# Altium PCB PCB1.PcbDoc
Units mm, origin at the board's own origin, x right, y up, seen from the top; angles counter-clockwise.
Board outline 52.96 x 24.13 mm, 4 copper layers (Top Layer, Int1 (GND), Int2 (PWR), Bottom Layer), stack 1.57 mm thick; 38 components, 32 nets, 151 pads, 60 vias.
Unrouted connection lines stored in the file: 4.
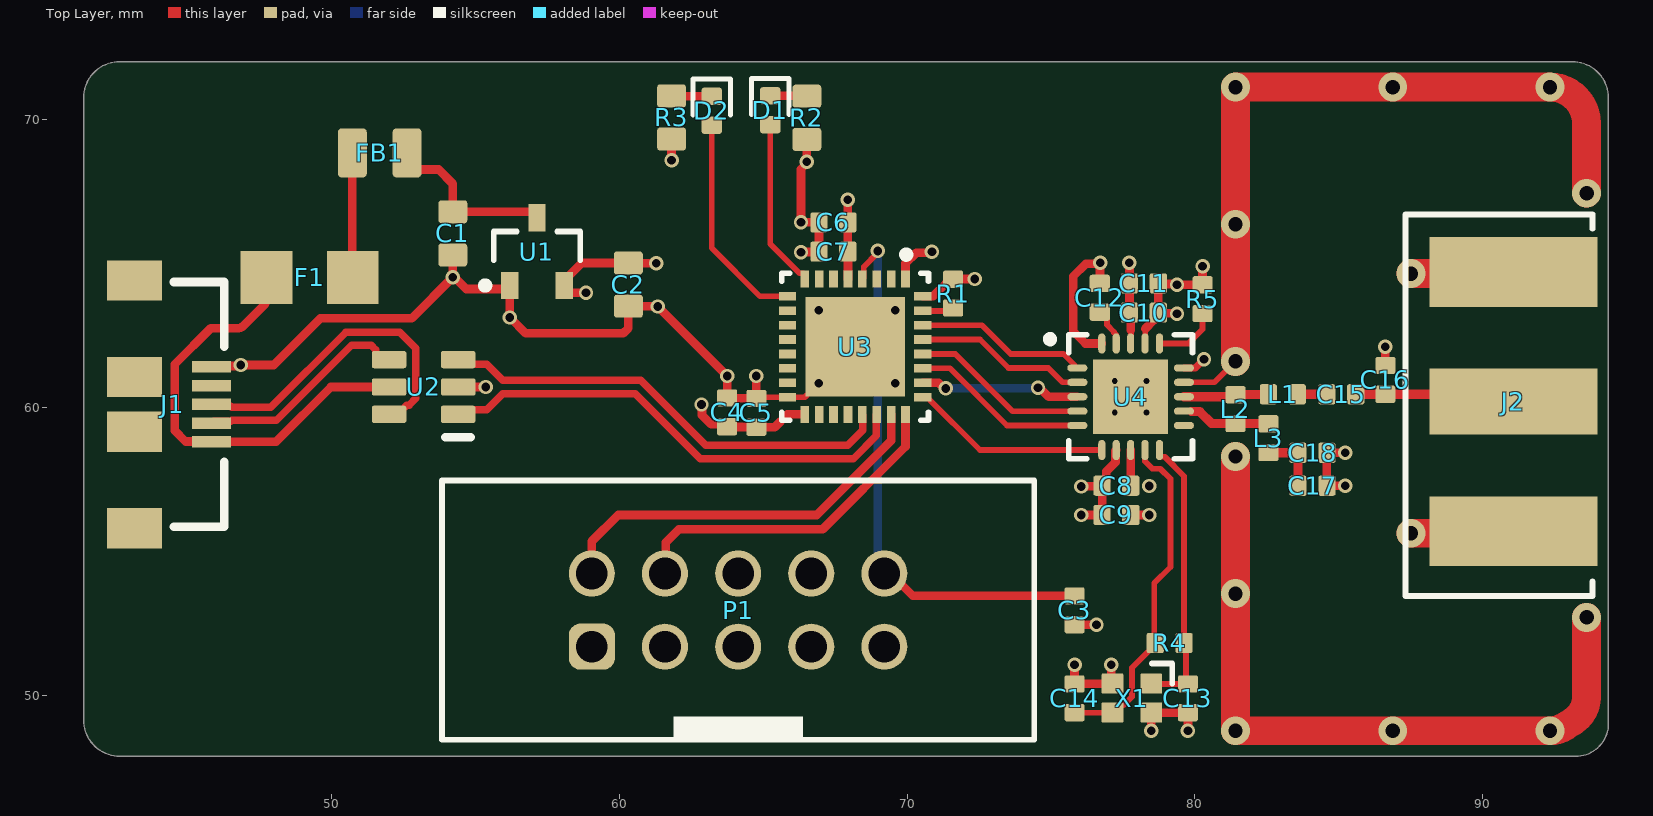
[diagram p0: Top Layer view]
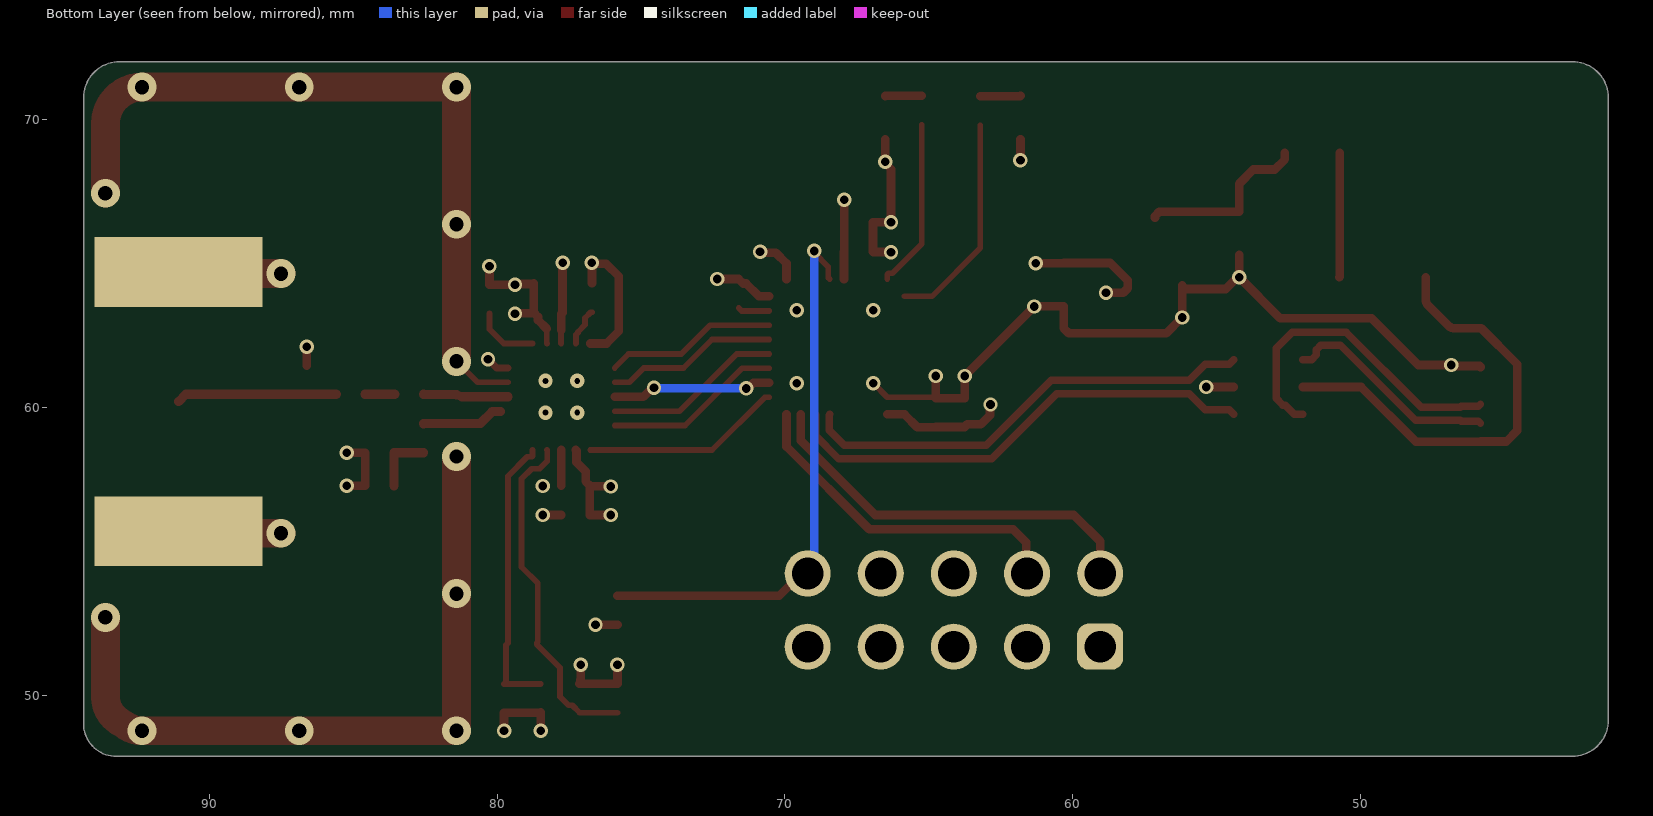
[diagram p1: Bottom Layer view, seen from below]
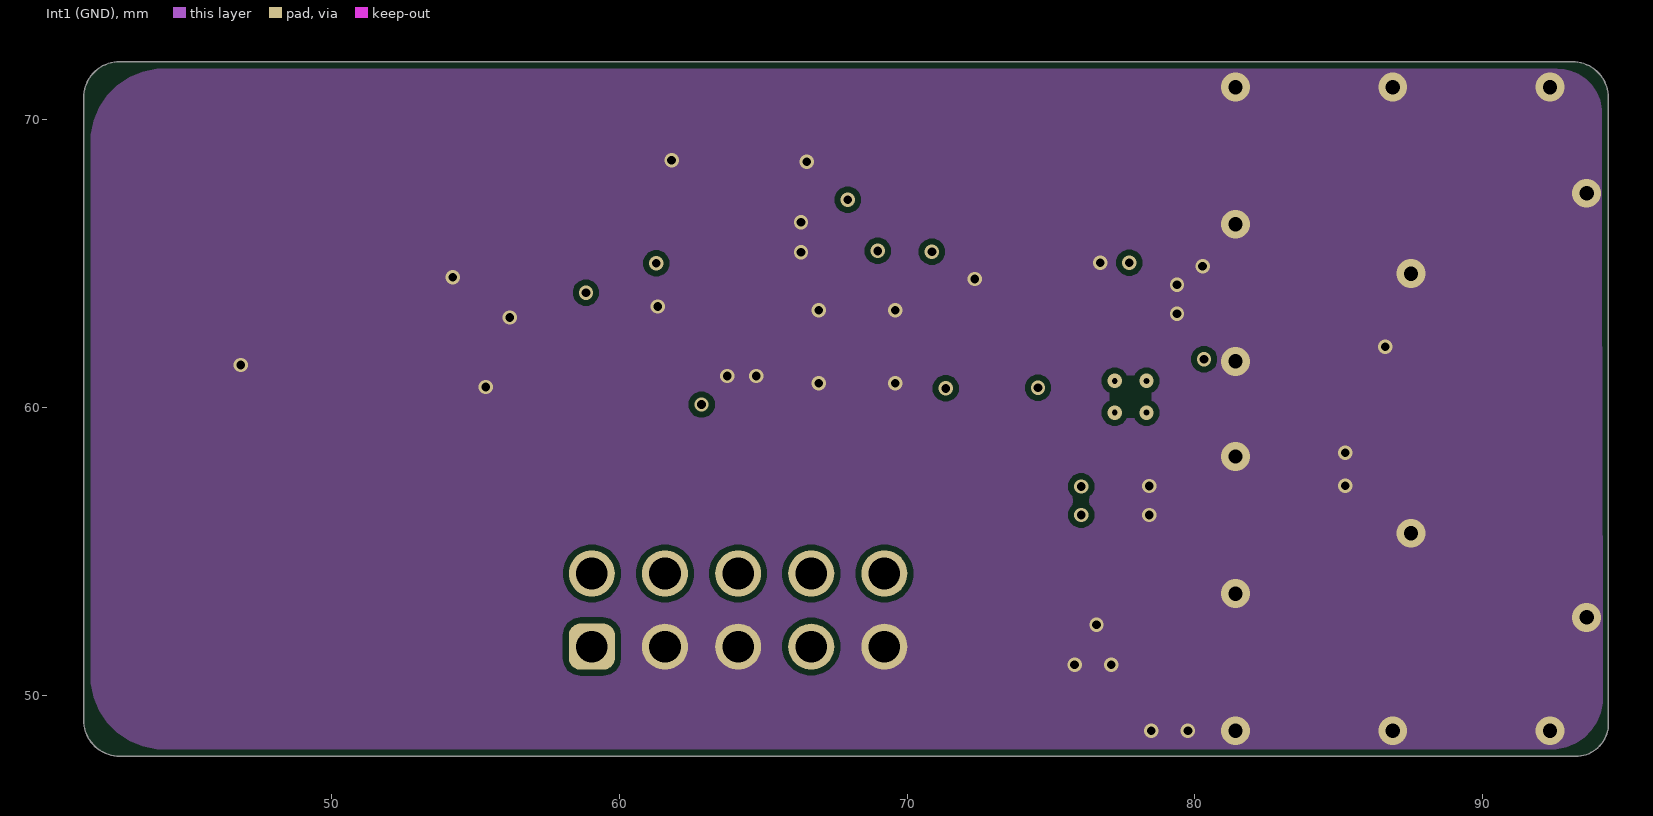
[diagram p2: Int1 (GND)]
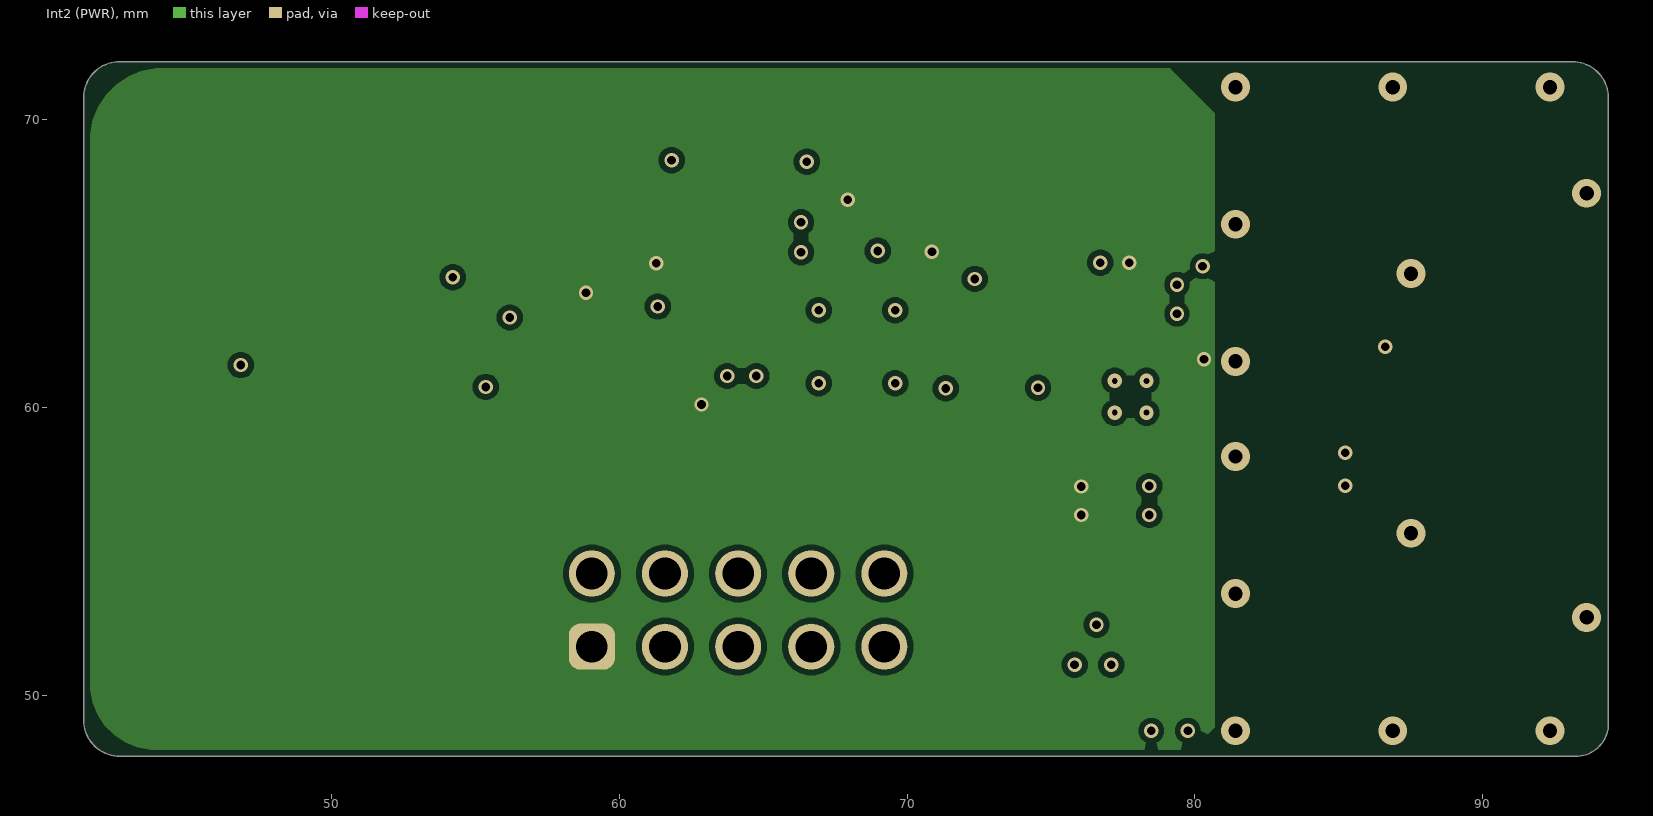
[diagram p3: Int2 (PWR)]
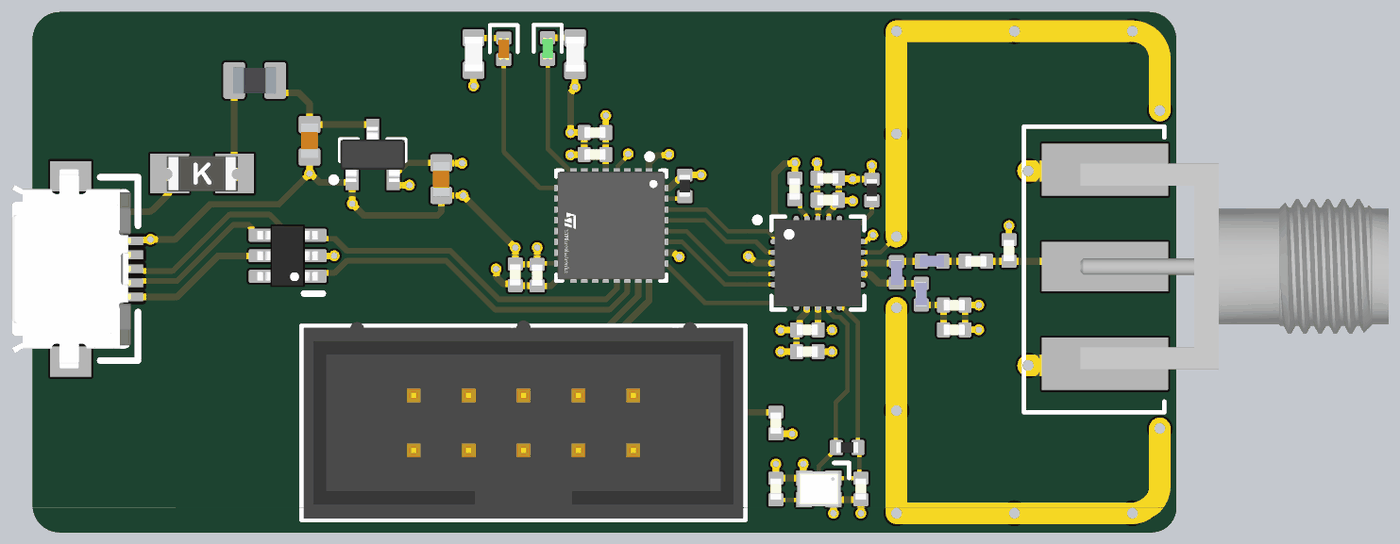
[diagram p4: 3D render of the assembled board from above, using the file's embedded part models]

## Layer stack, top to bottom
Top Solder: solder mask 0.0254, SM-001, Dk 4
Top Layer: signal copper 0.035
Dielectric 1: prepreg 0.2, PP-017, Dk 4.6
Int1 (GND): signal copper 0.0175
Dielectric 3: core 1.065, Core-039, Dk 4.6
Int2 (PWR): signal copper 0.0175
Dielectric 5: prepreg 0.2, PP-017, Dk 4.6
Bottom Layer: signal copper 0.035
Bottom Solder: solder mask 0.0254, SM-001, Dk 4

## Board outline
42.672,47.879 cw(c42.672,49.149) 41.402,49.149 41.402,70.739 cw(c42.672,70.739) 42.672,72.009 47.371,72.009 92.71,72.009 93.091,72.009 cw(c93.091,70.739) 94.361,70.739 94.361,49.022 cw(c93.218,49.022) 93.218,47.879 46.101,47.879

## Design rules (kind name [scope] priority, off if disabled: settings)
Clearance [All] p1: gap=0.2 ignorepadtopadclearanceinfootprint=FALSE
DiffPairsRouting [All] p1: maxlimit=0.254 minlimit=0.203 mostfreqgap=0.254 toplayer_maxgap=0.203 toplayer_prefgap=0.203 toplayer_minwidth=0.26 toplayer_maxwidth=0.26 toplayer_prefwidth=0.26 bottomlayer_maxgap=0.203 bottomlayer_prefgap=0.203 bottomlayer_minwidth=0.26 bottomlayer_maxwidth=0.26 bottomlayer_prefwidth=0.26 impedanceprofiledriven=TRUE impedanceprofileid={1DCC0A78-FB03-430D-8D8F-138BF20B9881} impedanceprofilevalue=90.000000 maxuncoupledlength=12.7
PolygonConnect [All] p1: connectstyle=Direct reliefconductorwidth=0.254 reliefentries=4 polygonreliefangle="90 Angle" airgapwidth=0.254
RoutingVias [All] p1: holewidth=0.5 width=1 viastyle="Through Hole" minholewidth=0.2 minwidth=0.5 maxholewidth=1 maxwidth=1.5
SolderMaskExpansion [All] p1: expansion=0.102 istentingtop=FALSE
SupplyNets "Schematic Supply Nets_2" [InNet('GND')] p1: voltage=0.000
SupplyNets "Schematic Supply Nets_1" [InNet('+3V3')] p2: voltage=0.000
SupplyNets "Schematic Supply Nets" [InNet('+5V')] p3: voltage=0.000
UnRoutedNet [All] p1: checkbadconnections=TRUE
Width RF [InNetClass('RF')] p1: maxlimit=0.318 minlimit=0.254 preferedwidth=0.318 toplayer_minwidth=0.318 bottomlayer_minwidth=0.318 impedanceprofiledriven=TRUE impedanceprofileid={B5B45265-C802-498C-81E6-945A3E96C03C} impedanceprofilevalue=50.000000 minimp=50.000000 maximp=50.000000 favimp=50.000000 // RF Impedance
Width [All] p2: maxlimit=1 minlimit=0.2 preferedwidth=0.3 midlayer1_minwidth=0.254 midlayer1_maxwidth=0.254 midlayer1_prefwidth=0.254 midlayer2_minwidth=0.254 midlayer2_maxwidth=0.254 midlayer2_prefwidth=0.254 minimp=50.000000 maximp=50.000000 favimp=50.000000
28 further rules are at their usual default settings.

## Classes and differential pairs
net class RF: NetC15_1 NetC15_2 NRF_ANT1 NRF_ANT2 NRF_VDD_PA
component class Sheet1: C1 C2 C3 C4 C5 C6 C7 C10 C11 C12 C13 C14 C15 C16 C17 C18 D1 D2 F1 FB1 J1 J2 L1 L2 L3 P1 R1 R2 R3 R4 R5 U1 U2 U3 U4 X1
differential pair USB_D: +USB_D_P -USB_D_N
differential pair USB_CONN_D: +USB_CONN_D_P -USB_CONN_D_N

## Components (designator, comment, footprint, x,y, rotation, side; value= is the part's Value field where it differs from the comment)
C1 "10uF" CAP_0603 54.229,66.04 r270 top
C2 "10uF" CAP_0603 60.325,64.262 r270 top
C3 "100n" CAP_0402 75.819,52.951 r90 top
C4 "1uF" CAP_0402 63.754,59.825 r270 top
C5 "100nF" CAP_0402 64.77,59.809 r270 top
C6 "100nF" CAP_0402 67.445,66.421 r0 top
C7 "100nF" CAP_0402 67.445,65.405 r0 top
C8 "10uF" CAP_0402 77.275,57.277 r180 top
C9 "10nF" CAP_0402 77.275,56.261 r180 top
C10 "10nF" CAP_0402 78.227,63.288 r180 top
C11 "10nF" CAP_0402 78.227,64.304 r180 top
C12 "33n" CAP_0402 76.695,63.804 r270 top
C13 "12pF" CAP_0402 79.756,49.895 r90 top
C14 "12pF" CAP_0402 75.819,49.895 r270 top
C15 "1p5" CAP_0402 85.082,60.452 r0 top
C16 "1p" CAP_0402 86.614,60.952 r270 top
C17 "2n2" CAP_0402 84.082,57.277 r180 top
C18 "4p7" CAP_0402 84.082,58.42 r180 top
D1 "GREEN" LED_0402_GREEN 65.253,70.315 r90 top
D2 "RED" LED_0402_RED 63.221,70.299 r90 top
F1 "100mA" FUSE_1206 49.252,64.516 r0 top
FB1 "100R @ 100MHz" FB_0805 51.689,68.834 r0 top
J1 "USB3100-30-A" USB3100-30-A 43.784,60.101 r270 top
J2 "SMA" 73251-1150 91.059,60.198 r0 top
L1 "3n9" IND_0402 83.05,60.452 r0 top
L2 "8n2" IND_0402 81.407,59.936 r90 top
L3 "2n7" IND_0402 82.55,58.928 r270 top
P1 "JTAG/SWD Connector" 61201021621 64.135,52.959 r0 top
R1 "10k" RES_0402 71.603,63.949 r270 top
R2 "2k2" RES_0603 66.523,70.053 r90 top
R3 "2k2" RES_0603 61.824,70.065 r90 top
R4 "1M" RES_0402 79.121,51.816 r180 top
R5 "22k" RES_0402 80.264,63.754 r90 top
U1 "XC6206P332MR" SOT95P240X115-3N 57.15,65.405 r90 top
U2 "USBLC6-2SC6" SOT-23-6 53.213,60.706 r90 top
U3 "STM32L432KBU6" FP-UFQFPN32-A0B8-MFG 68.199,62.103 r270 top
U4 "NRF24L01P-T" NRSC-QFN-20_L 77.766,60.367 r0 top
X1 "16MHz" XTAL_2016 77.811,49.903 r180 top

## Footprints (in the part's own frame and the unit in brackets; to place one, negate y for a bottom-side part, rotate by r counter-clockwise, add the part's x,y. Pads: shape width x height; smd on the part's side, far side on the other; paste and mask are expansions set on the pad)
73251-1150 [mm]
  rect 5.84x2.29 smd: 1(0,0)
  rect 5.84x2.42 smd: 2(0,-4.5) 2(0,4.5)
  rect 5.84x2.42 smd far side: 2(0,-4.5) 2(0,4.5)
  silkscreen extent -3.75,-6.75 2.75,6.5, body extent -1.14,-4.75 13.14,4.77, height 4.36
61201021621 [mm]
  rrect50% 1.6x1.6 hole 1.1: 1(-5.08,-1.27)
  round 1.6 hole 1.1: 2(-5.08,1.27) 3(-2.54,-1.27) 4(-2.54,1.27) 5(0,-1.27) 6(0,1.27) 7(2.54,-1.27) 8(2.54,1.27) 9(5.08,-1.27) 10(5.08,1.27)
  silkscreen extent -10.28,-4.5 10.28,4.5, body extent -10.18,-4.42 10.18,4.75, height 9.13
CAP_0402 [mm]
  rrect25% 0.6x0.7 smd: 1(-0.5,0) 2(0.5,0)
  body extent -0.5,-0.26 0.5,0.26, height 0.37
CAP_0603 [mm]
  rrect25% 0.8x1 smd: 1(-0.75,0) 2(0.75,0)
  body extent -0.8,-0.4 0.8,0.4, height 0.51
FB_0805 [mm]
  rrect25% 1x1.7 smd: 1(-0.95,0) 2(0.95,0)
  body extent -1,-0.63 1,0.63, height 0.86
FP-UFQFPN32-A0B8-MFG [mm]
  rect 0.6x0.3 smd paste+0 mask+0: 1(-2.35,1.75) 2(-2.35,1.25) 3(-2.35,0.75) 4(-2.35,0.25) 5(-2.35,-0.25) 6(-2.35,-0.75) 7(-2.35,-1.25) 8(-2.35,-1.75) 17(2.35,-1.75) 18(2.35,-1.25) 19(2.35,-0.75) 20(2.35,-0.25) 21(2.35,0.25) 22(2.35,0.75) 23(2.35,1.25) 24(2.35,1.75)
  rect 0.3x0.6 smd paste+0 mask+0: 9(-1.75,-2.35) 10(-1.25,-2.35) 11(-0.75,-2.35) 12(-0.25,-2.35) 13(0.25,-2.35) 14(0.75,-2.35) 15(1.25,-2.35) 16(1.75,-2.35) 25(1.75,2.35) 26(1.25,2.35) 27(0.75,2.35) 28(0.25,2.35) 29(-0.25,2.35) 30(-0.75,2.35) 31(-1.25,2.35) 32(-1.75,2.35)
  rect 3.45x3.45 smd paste+0 mask+0: 33(0,0)
  silkscreen extent -3.32,-2.55 2.55,2.55, body extent -2.75,-2.75 2.75,2.75, height 0.25
FUSE_1206 [mm]
  rect 1.8x1.84 smd: 1(-1.5,0) 2(1.5,0)
  body extent -1.65,-0.82 1.65,0.81, height 0.84
IND_0402 [mm]
  rrect25% 0.6x0.7 smd: 1(-0.5,0) 2(0.5,0)
  body extent -0.56,-0.26 0.56,0.26, height 0.67
LED_0402_GREEN [mm]
  rrect25% 0.6x0.7 smd: A(-0.5,0) K(0.5,0)
  silkscreen extent -0.15,-0.65 1.1,0.65, body extent -0.51,-0.25 0.51,0.25, height 0.45
LED_0402_RED [mm]
  rrect25% 0.6x0.7 smd: A(-0.5,0) K(0.5,0)
  silkscreen extent -0.15,-0.65 1.1,0.65, body extent -0.51,-0.25 0.51,0.25, height 0.45
NRSC-QFN-20_L [mm]
  oval 0.7x0.25 smd: 1(-1.85,1) 2(-1.85,0.5) 3(-1.85,0) 4(-1.85,-0.5) 5(-1.85,-1) 11(1.85,-1) 12(1.85,-0.5) 13(1.85,0) 14(1.85,0.5) 15(1.85,1)
  oval 0.25x0.7 smd: 6(-1,-1.85) 7(-0.5,-1.85) 8(0,-1.85) 9(0.5,-1.85) 10(1,-1.85) 16(1,1.85) 17(0.5,1.85) 18(0,1.85) 19(-0.5,1.85) 20(-1,1.85)
  rect 2.6x2.6 smd: 21(0,0)
  silkscreen extent -2.92,-2.15 2.15,2.15, body extent -2,-2 2,2, height 0.95
RES_0402 [mm]
  rrect25% 0.6x0.7 smd: 1(-0.5,0) 2(0.5,0)
  body extent -0.5,-0.25 0.5,0.25, height 0.3
RES_0603 [mm]
  rrect25% 0.8x1 smd: 1(-0.75,0) 2(0.75,0)
  body extent -0.8,-0.43 0.8,0.43, height 0.52
SOT95P240X115-3N [mm] "SOT23, 3-Leads, Body 2,90x2,40mm, Pitch 0,95mm, IPC Medium Density"
  rect 0.95x0.6 smd: 1(-1.175,0.95) 2(-1.175,-0.95) 3(1.175,0)
  silkscreen extent -1.3,-1.5 0.7,1.92, body extent -1.28,-1.5 1.28,1.5, height 1.15
SOT-23-6 [mm]
  rrect25% 0.6x1.2 smd: 1(-0.95,-1.2) 2(0,-1.2) 3(0.95,-1.2) 4(0.95,1.2) 5(0,1.2) 6(-0.95,1.2)
  silkscreen extent -1.75,-1.63 -1.75,-0.76, body extent -1.45,-1.4 1.45,1.4, height 1.45
USB3100-30-A [mm]
  rect 0.4x1.35 smd mask+0.15: 1(1.3,2.063) 2(0.65,2.063) 3(0,2.063) 4(-0.65,2.063) 5(-1.3,2.063)
  rect 1.4x1.9 smd: SH(-4.3,-0.613) SH(4.3,-0.613)
  rect 1.4x1.9 smd mask+0.3: SH(-0.95,-0.613) SH(0.95,-0.613)
  silkscreen extent -4.25,0.75 4.25,2.5, body extent -4.61,-3.34 4.61,2.16, height 2.69
XTAL_2016 [mm]
  rrect10% 0.75x0.7 smd: 1(-0.675,-0.5) 2(0.675,-0.5) 3(0.675,0.5) 4(-0.675,0.5)
  silkscreen extent -1.4,-1.2 -0.7,-0.5, body extent -1,-0.8 1,0.8, height 0.7

## Part data
C1 C2: library part CAP_0603, "Capacitor SMD 0603"
C3 C4 C5 C6 C7 C8 C9 C10 C11 C12 C13 C14 C15 C16 C17 C18: library part CAP_0402, "Capacitor SMD 0402"
D1: library part LED_0402_GREEN, "LED 0402 GREEN SMD"
D2: library part LED_0402_RED, "LED 0402 RED SMD"
F1: library part FUSE_PPTC_1206, "Fuse PPTC SMD 1206"
FB1: library part FB_0805, "Ferrite Bead SMD 0805"
J1: "USB Connector Type Micro B 2.0 SMD Reverse Mount", Manufacturer=GCT, Manufacturer Part Number=USB3100-30-A
J2: library part 73251-1150, "RF Connector 50 Ohms, SMA Jack Receptacle, Edge Mount, .25µm Gold (Au) Plating", Manufacturer=Molex, Manufacturer Part Number=73251-1150
L1 L2 L3: library part IND_0402, "Inductor SMD 0402"
P1: library part CON-JTAG-Box, "Board Connector, 10 Contact(s), 2 Row(s), Male, Straight, 0.1 inch Pitch, Solder Terminal, Black Insulator, Plug", Color=Black, Contact Resistance=20mΩ, Current Rating=3A, Flammability Rating="UL94 V-0", Insulation Resistance=1GΩ, Max Operating Temperature=105°C, Min Operating Temperature=-40°C, Operating Supply Voltage=250V, Connector Type="Male Pin", Contact Gender=Male, Contact Material=Copper, Contact Plating=Gold, Gender=Male, Height=8.85mm, Housing Material=PBT, Insulation Material=PBT, Lead Free="Lead Free", Lead Pitch=2.54mm, Length=20.36mm, Mount="Through Hole", NexarPartId=8917783, Number of Contacts=10, Number of Pins=10, Number of Positions=10, Number of Rows=2, Orientation=Vertical, Pitch=2.54mm, REACH SVHC=Unknown, RoHS=Compliant, Row Spacing=2.54mm, Termination=Solder, Voltage Rating=250V, Voltage Rating (DC)=250V, Width=20.36mm
R1 R4 R5: library part RES_0402, "Resistor SMD 0402"
R2 R3: library part RES_0603, "Resistor SMD 0603"
U1: "Linear voltage regulator 250mA; / Output voltage: 1.5V~5.0V (step size 0.1V)."
U2: "Low-Capacitance ESD Protection USB", Manufacturer=STMicroelectronics, Distributor Link=https://www.mouser.de/ProductDetail/STMicroelectronics/USBLC6-2SC6?qs=po45yt2pPpu%2FhNIlwQdTlg%3D%3D, Manufacturer Part Number=USBLC6-2SC6
U3: "Ultra-low-power Arm Cortex-M4 32-bit MCU+FPU, 100DMIPS, up to 256KB Flash, 64KB SRAM, USB FS, analog, audio.", Ambient Temperature Range High=+85°C, Ambient Temperature Range Low=-40°C, Frequency=80MHz, Manufacturer=STMicroelectronics, Max Junction Temp=+105°C, Max Supply Voltage=3.6V, Min Supply Voltage=1.62V, Package=UFQFPN32-A0B8, Temperature="-40°C to +85°C", Automotive=No, Category=IC, ComponentLink2Description=Datasheet, ComponentLink2URL=https://www.st.com/resource/en/datasheet/stm32l432kb.pdf, Core Architecture="ARM Cortex-M4", Data Bus Width=32bits, Device Class L1="Integrated Circuits (ICs)", Device Class L2="Embedded Processors and Controllers", Device Class L3=Microcontrollers, Digikey Description="IC MCU 32BIT 128KB FLASH 32QFPN", Height=0.6mm, Interface=I2C,SPI,UART,USART,USB,IrDA, Ipc Land Pattern Name=QFN50P500X500X55-32, Lead Free=Yes, Manufacturer Part Number=STM32L432KBU6, Memory Size=128KBytes, Memory Type=FLASH, Number Of A/D Converters=1, Number Of Adc Channels=10, Number Of Cores=1, Number Of I2C Channels=2, Number Of I/Os=26, Number Of Spi Channels=2, Number Of Timers/Counters=8, Number Of Uart Channels=1, Octopart=https://octopart.com/stm32l432kbu6-stmicroelectronics-74568735, Ram Size=64KBytes, RoHS=TRUE, Temperature Range High=+85°C, Temperature Range Low=-40°C
U4: library part nRF24L01, "Single Chip Transceiver, 2.4 GHz, 60 mW, 1.9 to 3.6 V, -40 to 85 degC, 20-Pin QFN, RoHS, Tray", Current - Receiving=12.6mA~13.5mA, Current - Transmitting=7mA~11.3mA, Frequency=2.4GHz, Manufacturer="Nordic Semiconductor", Operating Temperature=-40°C~85°C, Package / Case=20-VFQFNExposedPad, Package Description="20-Pin Quad Flat No-lead Package, Body 4 x 4 mm, Pitch 0.5 mm", Package Reference=QFN20, Power - Output=0dBm, Standard Package=490, Voltage - Supply=1.9V~3.6V, Category=RF/IFandRFID, Data Rate (Max)=2Mbps, Datasheet URL=http://www.nordicsemi.com/eng/content/download/2726/34069/file/nRF24L01P_Product_Specification_1_0.pdf, Datasheet Version="Rev. 1.0, 09/2008", Design Resources=DevelopmentToolSelector, Family=RFTransceiverICs, For Use With=1490-1002-ND-KITEVALUATIONNRF24L01P1568-1295-ND-SPARKFUNTRANSCEIVERBREAKOUT-1568-1296-ND-SPARKFUNTRANSCEIVERBREAKOUT-1471-1410-ND-DEVBOARDNRFSCLICKNRF24L01P-MODULE-PCB-ND-KITEVALNRF24L01+PCBANTENNANRF24L01P-MODULE-SMA-ND-KITEVALNRF24L01+SMACONNNRF24L01P-UPGRADE-ND-UPGRADE2PCB/1SMANRF24L01103990038-ND-DEVDUINOSENSORNODEV1.3103990053-ND-DEVDUINOSENSORNODEV2(ATMEGA103990074-ND-DEVDUINOSENSORNODE106990026-ND-ENERGYMONITORSHIELDV2113990088-ND-WIRELESSGATESHIELD113990095-ND-DEVDUINOSENSORNODEV3(ATMEGA106030001-ND-ENERGYMONITORSHIELD1597-1361-ND-DEVDUINOSENSORNODEV2.2(ATMEG105990030-ND-RGBWSTRIPWIRELESSSHIELDV1.0, GPIO=-, Manufacturer URL=http://www.nordicsemi.com/eng/Products/, Memory Size=-, Modulation=GFSK, Mounting Technology=SurfaceMount, Online Catalog=nRF24L01+, Other Names=1490-1019, Packaging=Tray, Protocol=-, RF Family/Standard=GeneralISM>1GHZ, Sensitivity=-94dBm, Serial Interfaces=SPI, Series=-, Type=TxRxOnly
X1: library part XTAL_2016, "Crystal SMD 4-Pin 2.0x1.6mm"

## Via types
v1: diameter 0.5, hole 0.3, Top Layer to Bottom Layer, 42 vias
v2: diameter 1, hole 0.5, Top Layer to Bottom Layer, 14 vias
v3: diameter 0.5, hole 0.2, Top Layer to Bottom Layer, 4 vias

## Nets (pads, with @x,y where several pads share a name; then routed paths per layer and width w, separated by ;. In a path a pad name is that pad's centre, name@x,y a point inside that pad or via, vN(x,y) a via of type N, cw(c..) or ccw(c..) an arc to the next point about the centre after c; other vN are vias at no path point)
+3V3: C2.1 C4.2 C5.2 C6.2 C7.2 C8.2 C9.2 C10.2 C11.2 P1.1 U1.2 U3.1 U3.5 U3.17 U4.7 U4.15 U4.18 | length 20.8
  Top Layer w0.2: U4.18 77.775,62.226 77.775,62.687
  Top Layer w0.25: U4.15 80.011,61.367 v1(80.315,61.671)
  Top Layer w0.3: v1(58.852,63.983) 58.25,63.983 58.1,64.133 U1.2 58.1,64.405 58.707,65.012 C2.1 60.332,65.005 61.284,65.005 v1(61.29,64.999) ; v1(62.865,60.096) 62.882,60.079 62.882,59.724 63.196,59.41 63.669,59.41 63.762,59.317 64.762,59.317 C5.2 65.405,59.309 65.849,59.753 U3.17 ; v1(67.945,67.208) C6.2 C7.2 67.949,65.401 U3.5 ; U3.1 69.949,64.996 70.32,65.367 70.828,65.367 v1(70.866,65.405) ; v1(76.048,56.261) C9.2 C8.2 ; v1(76.048,57.252) 76.06,57.264 76.762,57.264 C8.2 ; U4.7 77.241,58.492 77.241,58.095 76.925,57.779 76.925,57.427 C8.2 ; v1(77.724,65.024) 77.725,65.023 C11.2 C11.2 C10.2 77.775,63.24 77.775,62.687
+5V: F1.1 J1.1 U2.5 | length 15.6
  Top Layer w0.3: F1.1 47.752,63.746 cw(c47.452,63.751) 47.665,63.54 46.959,62.834 cw(c46.747,63.046) 46.747,62.746 45.822,62.746 44.577,61.501 44.577,59.182 44.947,58.812 45.836,58.812 J1.1 48.09,58.801 49.995,60.706 U2.5
GND: C1.2 C2.2 C3.1 C4.1 C5.1 C6.1 C7.1 C8.1 C9.1 C10.1 C11.1 C12.1 C13.1 C14.1 C16.1 C17.1 C18.1 J1.5 J2.2 P1.3 P1.5 P1.9 R1.1 R2.1 R3.1 R5.2 U1.1 U2.2 U3.16 U3.32 U3.33 U4.8 U4.14 U4.17 U4.20 X1.2 X1.4 | length 117.4
  Top Layer w0.2: C5.1 64.814,60.353 U3.16 66.449,60.353 v1(66.929,60.833) ; U4.17 78.275,62.226 78.275,62.726 ; U4.14 80.679,60.867 v2(81.407,61.595)
  Top Layer w0.3: J1.5 45.881,61.434 46.829,61.434 v1(46.863,61.468) 48.006,61.468 49.632,63.094 52.807,63.094 v1(54.229,64.516) ; C1.2 v1(54.229,64.516) ; U2.2 v1(55.372,60.706) ; U1.1@56.139,64.135 56.114,64.11 54.69,64.11 54.283,64.516 v1(54.229,64.516) ; U1.1 56.205,64.225 56.205,63.124 v1(56.21,63.119) 56.755,62.574 60.149,62.574 60.325,62.75 C2.2 60.331,63.506 61.335,63.506 v1(61.341,63.5) v1(63.754,61.087) C4.1 63.762,60.317 64.762,60.317 C5.1 v1(64.77,61.087) ; v1(61.824,68.58) R3.1 ; v1(66.319,65.38) 66.332,65.392 66.932,65.392 C7.1 C6.1 v1(66.319,66.421) 66.319,68.272 66.523,68.475 v1(66.523,68.529) R2.1 ; U3.32 70.905,63.853 71.352,64.299 71.453,64.299 71.611,64.457 v1(72.357,64.457) ; v1(75.819,51.054) C14.1 75.823,50.399 77.132,50.399 X1.2 77.089,50.603 v1(77.089,51.054) ; C3.1 v1(76.581,52.451) ; C12.1 76.702,64.311 76.702,65.018 v1(76.708,65.024) 76.67,64.986 76.213,64.986 75.768,64.541 75.768,62.647 76.198,62.217 U4.20 ; U4.8 77.77,58.513 77.77,57.281 C8.1 ; C9.1 v1(78.418,56.261) ; 78.275,62.726 78.577,63.028 78.577,63.138 C10.1 ; v1(78.486,48.768) X1.4 78.49,49.399 79.752,49.399 C13.1 v1(79.756,48.768) ; v1(79.375,63.246) 79.354,63.267 78.748,63.267 C10.1 ; v1(80.264,64.897) R5.2 80.26,64.258 79.379,64.258 v1(79.375,64.262) 79.354,64.283 78.748,64.283 C11.1 C10.1 ; v1(85.217,57.277) C17.1 C18.1 v1(85.217,58.42) ; C16.1 v1(86.614,62.103)
  Top Layer w1: v2(81.407,58.293) v2(81.407,48.768) v2(86.868,48.768) v2(92.329,48.768) ccw(c92.329,49.768) 92.876,48.931 93.146,49.107 ccw(c92.599,49.944) 93.599,49.944 v2(93.599,52.705) ; v2(81.407,61.595) v2(81.407,66.358) v2(81.407,71.12) v2(86.868,71.12) v2(92.329,71.12) cw(c92.329,69.85) 93.599,69.85 v2(93.599,67.437) ; v2(87.503,55.626) 90.987,55.626 J2.2@91.059,55.698 ; v2(87.503,64.643) 91.004,64.643 J2.2@91.059,64.698
  other v1: 78.417,57.267 69.586,60.833 66.929,63.373 69.586,63.373
  other v2: 81.407,53.53
NetC1_1: C1.1 FB1.2 U1.3 | length 6.2
  Top Layer w0.3: FB1.2 52.639,68.609 52.989,68.259 53.737,68.259 54.229,67.767 C1.1 57,66.79 57.15,66.64 U1.3
NetC12_2: C12.2 U4.19 | length 1.4
  Top Layer w0.2: C12.2 76.745,63.304 76.945,63.104 76.945,62.864 77.191,62.618 77.191,62.585 77.256,62.52 77.256,62.227 U4.19
NetC15_1: C15.1 L1.2 | length 1
  Top Layer w0.318: L1.2 C15.1
NetC15_2: C15.2 C16.2 J2.1 | length 5.6
  Top Layer w0.318: C15.2 C16.2 90.805,60.452 J2.1
NetD1_A: D1.A U3.8 | length 5.9
  Top Layer w0.2: D1.A 65.253,65.669 66.268,64.653 66.399,64.653 66.449,64.603 U3.8
NetD1_K: D1.K R2.2 | length 1.3
  Top Layer w0.3: D1.K 66.511,70.815 R2.2
NetD2_A: D2.A U3.9 | length 7.6
  Top Layer w0.2: D2.A 63.221,65.532 64.9,63.853 U3.9
NetD2_K: D2.K R3.2 | length 1.4
  Top Layer w0.3: R3.2 61.832,70.807 63.213,70.807 D2.K
NetF1_2: F1.2 FB1.1 | length 4.3
  Top Layer w0.3: FB1.1 50.739,64.529 F1.2
NetR1_2: R1.2 U3.31 | length 1.1
  Top Layer w0.2: U3.31 70.554,63.348 71.501,63.348 R1.2
NetR5_1: R5.1 U4.16 | length 2.2
  Top Layer w0.2: U4.16 79.768,62.217 80.264,62.713 R5.1
NRF_ANT1: L2.1 L3.1 U4.12 | length 2.8
  Top Layer w0.318: U4.12@79.883,59.851 80.166,59.851 80.58,59.436 L2.1 81.411,59.432 82.546,59.432 L3.1
NRF_ANT2: L1.1 L2.2 U4.13 | length 3
  Top Layer w0.318: U4.13 79.829,60.367 ccw(c79.829,60.685) 79.843,60.367 79.86,60.368 cw(c79.883,59.851) 79.883,60.369 80.166,60.369 81.216,60.369 L2.2 81.415,60.444 82.542,60.444 L1.1
NRF_CE: U3.30 U4.1 | length 6
  Top Layer w0.2: U3.30 70.553,62.849 72.604,62.849 73.604,61.849 75.434,61.849 U4.1
NRF_IRQ: U3.25 U4.6 | length 7
  Top Layer w0.2: U3.25 70.699,60.353 72.535,58.517 U4.6
NRF_VDD_PA: C17.2 C18.2 L3.2 U4.11 | length 2.2
  Top Layer w0.318: L3.2 82.554,58.424 83.578,58.424 C18.2 C17.2
NRF_XC1: C13.2 R4.1 U4.10 X1.1 | length 9.9
  Top Layer w0.2: X1.1 78.494,50.395 C13.2 79.688,50.463 79.688,51.748 R4.1 79.621,57.61 78.948,58.282 78.789,58.282 78.766,58.306 U4.10
NRF_XC2: C14.2 R4.2 U4.9 X1.3 | length 11.9
  Top Layer w0.2: C14.2 77.128,49.395 X1.3 77.386,49.653 77.515,49.653 77.811,49.949 77.811,50.956 78.621,51.766 R4.2 78.588,51.849 78.588,53.899 79.146,54.458 79.146,57.519 78.798,57.867 78.59,57.867 78.521,57.867 78.257,58.131 78.257,58.508 U4.9
NRST: C3.2 P1.10 U3.4 | length 19.4
  Top Layer w0.2: U3.4 68.499,64.503 68.499,64.877 68.986,65.365 v1(68.986,65.43)
  Top Layer w0.3: P1.10 69.427,54.229 70.205,53.451 C3.2
  Bottom Layer w0.3: v1(68.986,65.43) 68.986,54.458 P1.10
SPI3_CS: U3.29 U4.2 | length 6
  Top Layer w0.2: U3.29 72.535,62.353 73.521,61.366 74.905,61.366 75.404,60.867 U4.2
SPI3_MISO: U3.27 U4.5 | length 6.2
  Top Layer w0.2: U3.27 71.489,61.353 73.475,59.367 U4.5
SPI3_MOSI: U3.28 U4.4 | length 6.2
  Top Layer w0.2: U3.28 71.675,61.853 73.661,59.867 U4.4
SPI3_SCK: U3.26 U4.3 | length 5.6
  Top Layer w0.3: U3.26 71.097,60.853 71.294,60.655 v1(71.349,60.655) ; v1(74.549,60.681) 74.603,60.681 74.917,60.367 U4.3
  Bottom Layer w0.3: v1(71.349,60.655) 71.361,60.668 74.536,60.668 v1(74.549,60.681)
SWCLK: P1.4 U3.24 | length 11.9
  Top Layer w0.3: P1.4 61.626,54.26 61.626,55.303 62.084,55.761 67.073,55.761 69.949,58.637 U3.24
SWDIO: P1.2 U3.23 | length 13.9
  Top Layer w0.3: P1.2 59.055,55.347 59.969,56.261 66.866,56.261 69.449,58.844 U3.23
USB_CONN_D_N: J1.2 U2.4 | length 7.6
  Top Layer w0.26: J1.2 45.917,59.521 46.521,59.521 46.544,59.544 48.103,59.544 50.709,62.15 51.391,62.15 51.543,61.998 51.543,61.826 51.713,61.656 U2.4
USB_CONN_D_P: J1.3 U2.6 | length 11.3
  Top Layer w0.26: J1.3 45.917,60.031 46.521,60.031 46.544,60.008 47.912,60.008 50.517,62.614 52.378,62.614 52.943,62.049 52.943,60.313 52.706,60.076 52.633,60.076 52.313,59.756 U2.6
USB_D_N: U2.3 U3.21 | length 16.1
  Top Layer w0.26: U2.3 54.574,61.495 55.403,61.495 55.961,60.938 60.749,60.938 63.008,58.679 67.95,58.679 68.469,59.198 68.469,59.733 U3.21
USB_D_P: U2.1 U3.22 | length 16.8
  Top Layer w0.26: U2.1 54.574,59.917 55.403,59.917 55.961,60.474 60.557,60.474 62.816,58.216 68.142,58.216 68.932,59.006 68.932,59.736 U3.22
pads on no net: J1.4 J1.SH P1.6 P1.7 P1.8 U3.2 U3.3 U3.6 U3.7 U3.10 U3.11 U3.12 U3.13 U3.14 U3.15 U3.18 U3.19 U3.20 U4.21
copper on no net:
  other v3: 77.216,59.817 78.316,59.817 77.216,60.917 78.316,60.917

## Polygon pours and split planes (outlines as drawn)
GND on Int1 (GND) "GND_L02_P000" (solid, pour order 0): 94.132,65.38 94.132,70.206 ccw(c92.583,70.206) 92.583,71.755 44.196,71.755 ccw(c44.196,69.215) 41.656,69.215 41.656,50.673 ccw(c44.196,50.673) 44.196,48.133 92.38,48.133 ccw(c92.38,49.911) 94.158,49.911 94.158,52.273
+3V3 on Int2 (PWR) "+3V3_L03_P001" (solid, pour order 1): 80.696,70.206 79.121,71.78 44.171,71.78 ccw(c44.171,69.24) 41.631,69.24 41.631,50.419 ccw(c43.942,50.419) 43.942,48.108 79.908,48.108 80.696,48.895 80.696,54.458

## Silkscreen, mask and mechanical layers (free items; w line width, h text height)
Top Solder:
  lines w1: 81.407,58.293 81.407,48.768 92.298,48.768 ccw(c92.298,50.069) 93.218,49.149 ccw(c92.298,50.069) 93.599,50.069 93.599,50.165 93.599,52.451 ; 81.407,61.595 81.407,71.12 92.298,71.12 cw(c92.298,69.819) 93.218,70.739 cw(c92.298,69.819) 93.599,69.819 93.599,69.723 93.599,67.437
Mechanical 1:
  the board outline again, w0.3

## Text inside footprints (layer, text, board x,y; h text height)
D1: Mechanical 13 "+" at 64.744,68.432 h0.5 r90
D2: Mechanical 13 "+" at 62.712,68.416 h0.5 r90
J2: Mechanical 13 "PCB EDGE" at 95.209,62.298 h0.3 r90